# Altium PCB PCB1.PcbDoc
Units mil, origin at the board's own origin, x right, y up, seen from the top; angles counter-clockwise.
Board outline 5700 x 3500 mil, 2 copper layers (Top Layer, Bottom Layer); 35 components, 30 nets, 122 pads, 17 vias.
Unrouted connection lines stored in the file: 59.
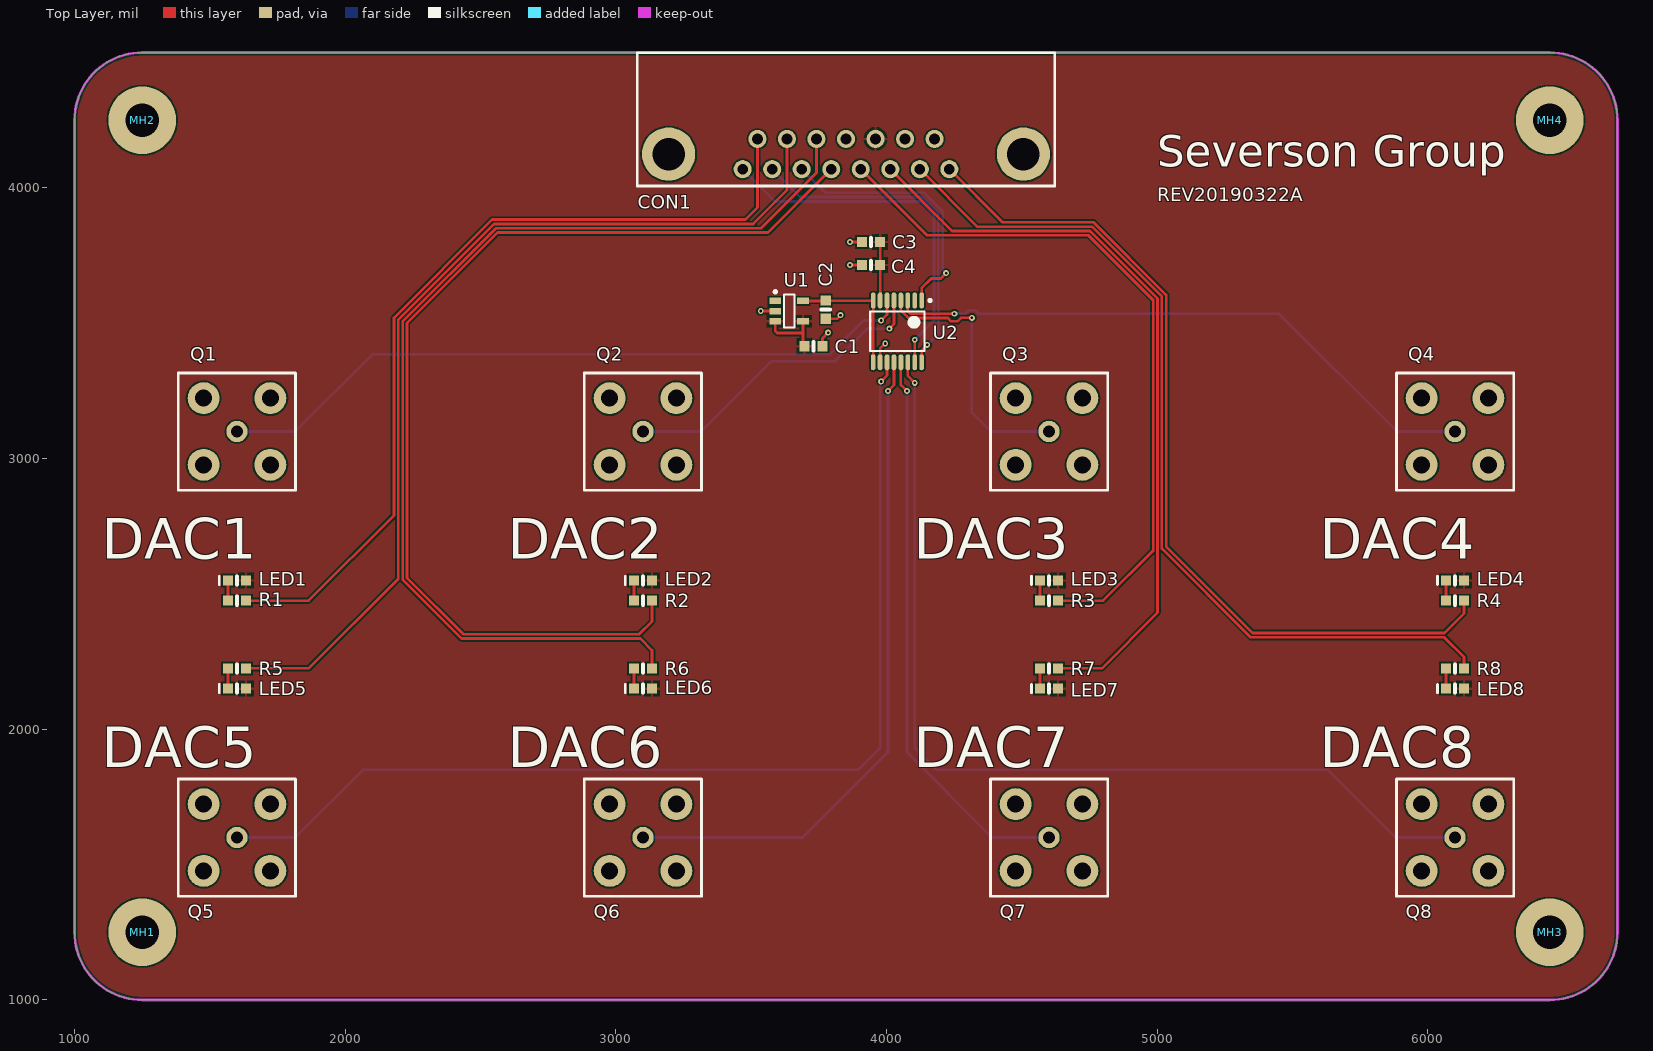
[diagram p0: Top Layer view]
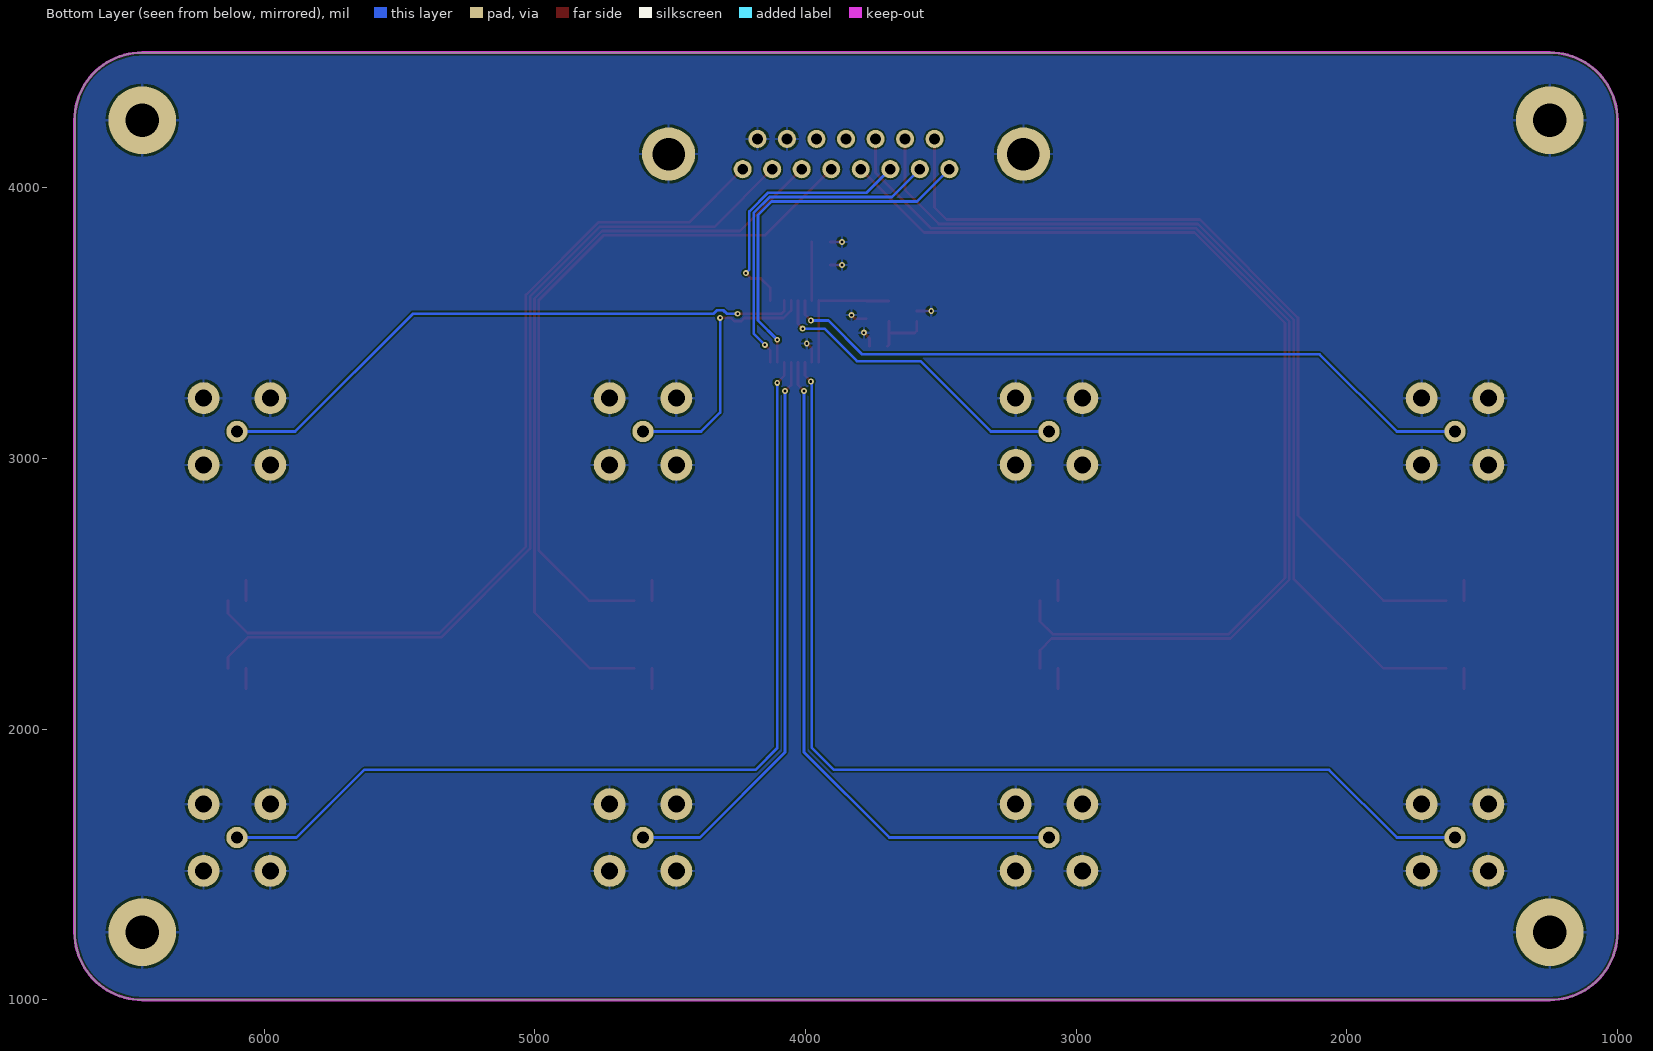
[diagram p1: Bottom Layer view, seen from below]
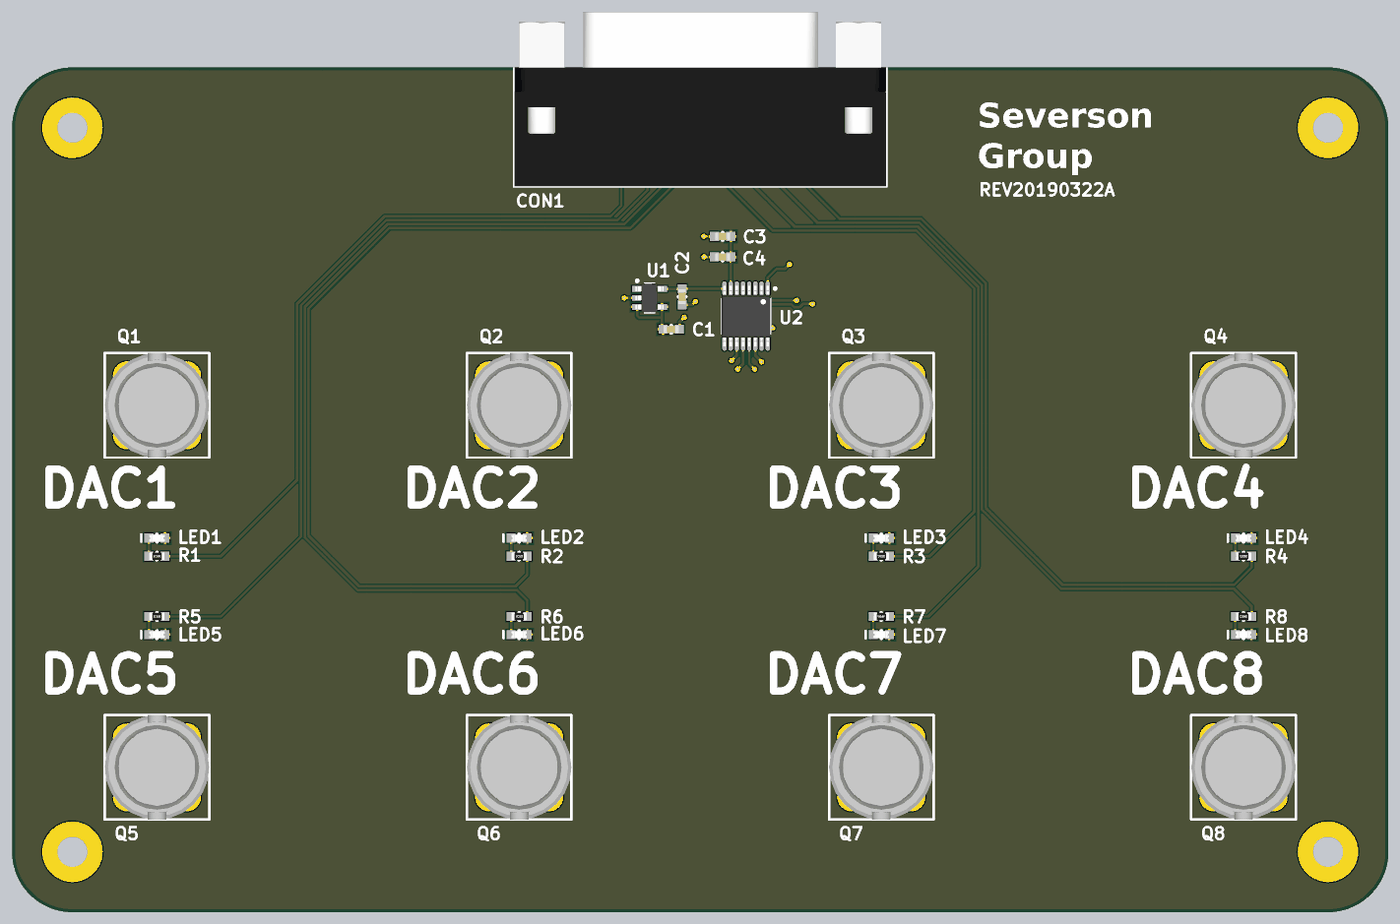
[diagram p2: 3D render of the assembled board from above, using the file's embedded part models]

## Layer stack, top to bottom
Top Solder: solder mask 0.4, Solder Resist, Dk 3.5
Top Layer: signal copper 1.4
Dielectric 1: dielectric 12.6, FR-4, Dk 4.8
Bottom Layer: signal copper 1.4
Bottom Solder: solder mask 0.4, Solder Resist, Dk 3.5

## Board outline
6450,1000 ccw(c6450,1250) 6700,1250 6700,4250 ccw(c6450,4250) 6450,4500 1250,4500 ccw(c1250,4250) 1000,4250 1000,1250 ccw(c1250,1250) 1250,1000

## Design rules (kind name [scope] priority, off if disabled: settings)
BoardOutlineClearance BoardOutlineClearance_tSilk [OnLayer('Top Overlay')] p1: gap=0 ignorepadtopadclearanceinfootprint=FALSE
BoardOutlineClearance BoardOutlineClearance_bSilk [OnLayer('Bottom Overlay')] p2: gap=0 ignorepadtopadclearanceinfootprint=FALSE
BoardOutlineClearance [All] p3: gap=12 ignorepadtopadclearanceinfootprint=FALSE
Clearance [All] p1: gap=6 ignorepadtopadclearanceinfootprint=FALSE except(12: Arc-Via Track-Via)
DiffPairsRouting [All] p1 off: maxlimit=10 minlimit=10 mostfreqgap=10 toplayer_minwidth=10 toplayer_maxwidth=10 toplayer_prefwidth=10 bottomlayer_minwidth=10 bottomlayer_maxwidth=10 bottomlayer_prefwidth=10 maxuncoupledlength=500
Height [All] p1: minheight=0 maxheight=5000 prefheight=500
HoleSize [All] p1: absolutevalues=TRUE maxlimit=248.03 minlimit=7.87 maxpercent=80.000 minpercent=20.000
HoleToHoleClearance [All] p1: gap=12 allowstackedmicrovias=TRUE
MinimumAnnularRing [All] p1: minimumring=6
PolygonConnect [All] p1: connectstyle=Relief reliefconductorwidth=10 reliefentries=4 polygonreliefangle="90 Angle" airgapwidth=10
RoutingVias [All] p1: holewidth=10 width=22 viastyle="Through Hole" minholewidth=10 minwidth=22 maxholewidth=20 maxwidth=50
SolderMaskExpansion [All] p1: expansion=4
Width [All] p1: maxlimit=100 minlimit=6 preferedwidth=10
26 further rules are at their usual default settings.

## Components (designator, comment, footprint, x,y, rotation, side; value= is the part's Value field where it differs from the comment)
C1 "Capacitor" 0603-CAP 3730,3415 r0 top value=4.7uF
C2 "Capacitor" 0603-CAP 3775,3550 r270 top value=4.7uF
C3 "Capacitor" 0603-CAP 3942.83,3800 r0 top value=1uF
C4 "Capacitor" 0603-CAP 3942.83,3715 r0 top value=100nF
CON1 "A-DF 15 A/KG-T2S" "A-DF 15 A/KG-T2S" 3850,4125 r180 top
LED1 "LED" 0603-LED 1600,2550 r0 top
LED2 "LED" 0603-LED 3100,2550 r0 top
LED3 "LED" 0603-LED 4600,2550 r0 top
LED4 "LED" 0603-LED 6100,2550 r0 top
LED5 "LED" 0603-LED 1600,2150 r0 top
LED6 "LED" 0603-LED 3100,2150 r0 top
LED7 "LED" 0603-LED 4600,2150 r0 top
LED8 "LED" 0603-LED 6100,2150 r0 top
MH1 "MOUNT_HOLE" MOUNTING_HOLE 1250,1250 r0 top
MH2 "MOUNT_HOLE" MOUNTING_HOLE 1250,4250 r0 top
MH3 "MOUNT_HOLE" MOUNTING_HOLE 6450,1250 r0 top
MH4 "MOUNT_HOLE" MOUNTING_HOLE 6450,4250 r0 top
Q1 "5-1634503-1" 5-1634503-1 1600,3100 r0 top
Q2 "5-1634503-1" 5-1634503-1 3100,3100 r0 top
Q3 "5-1634503-1" 5-1634503-1 4600,3100 r0 top
Q4 "5-1634503-1" 5-1634503-1 6100,3100 r0 top
Q5 "5-1634503-1" 5-1634503-1 1600,1600 r0 top
Q6 "5-1634503-1" 5-1634503-1 3100,1600 r0 top
Q7 "5-1634503-1" 5-1634503-1 4600,1600 r0 top
Q8 "5-1634503-1" 5-1634503-1 6100,1600 r0 top
R1 "Resistor" 0603-RES 1600,2475 r180 top value=4.7k
R2 "Resistor" 0603-RES 3100,2475 r180 top value=4.7k
R3 "Resistor" 0603-RES 4600,2475 r180 top value=4.7k
R4 "Resistor" 0603-RES 6100,2475 r180 top value=4.7k
R5 "Resistor" 0603-RES 1600,2225 r180 top value=4.7k
R6 "Resistor" 0603-RES 3100,2225 r180 top value=4.7k
R7 "Resistor" 0603-RES 4600,2225 r180 top value=4.7k
R8 "Resistor" 0603-RES 6100,2225 r180 top value=4.7k
U1 "LM4132CMF-4.1/NOPB" SOT95P280X145-5N 3640,3545 r0 top
U2 "DAC128S085" TSOP65P640X120-16N 4040,3470 r270 top

## Footprints (in the part's own frame and the unit in brackets; to place one, negate y for a bottom-side part, rotate by r counter-clockwise, add the part's x,y. Pads: shape width x height; smd on the part's side, far side on the other; paste and mask are expansions set on the pad)
5-1634503-1 [mm] "CONN BNC JACK STR 50 OHM PCB"
  round 2 hole 1.1: 1(0,0)
  round 3 hole 1.6: 2(-3.13,-3.13) 2(-3.13,3.13) 2(3.13,-3.13) 2(3.13,3.13)
  silkscreen extent -5.5,-5.5 5.5,5.5, body extent -5.5,-5.51 5.5,5.51, height 13.7
0603-CAP [mm]
  rect 0.95x0.95 smd: 1(-0.85,0) 2(0.85,0)
  silkscreen extent 0,-0.38 0,0.38, body extent -0.8,-0.4 0.8,0.4, height 0.79
0603-LED [mm]
  rect 0.95x0.95 smd: A(0.85,0) C(-0.85,0)
  silkscreen extent -1.65,-0.38 0,0.38, body extent -0.83,-0.37 0.82,0.81, height 0.8
0603-RES [mm]
  rect 0.95x0.95 smd: 1(-0.85,0) 2(0.85,0)
  silkscreen extent 0,-0.38 0,0.38, body extent -0.8,-0.4 0.8,0.4, height 0.44
"A-DF 15 A/KG-T2S" [mm] "CONN D-SUB RCPT 15POS R/A SOLDER"
  round 1.7 hole 1: 1(9.695,1.42) 2(6.925,1.42) 3(4.155,1.42) 4(1.385,1.42) 5(-1.385,1.42) 6(-4.155,1.42) 7(-6.925,1.42) 8(-9.695,1.42) 9(8.31,-1.42) 10(5.54,-1.42) 11(2.77,-1.42) 12(0,-1.42) 13(-2.77,-1.42) 14(-5.54,-1.42) 15(-8.31,-1.42)
  round 5 hole 3.05: 16(-16.65,0) 17(16.65,0)
  silkscreen extent -19.6,-9.5 19.6,3, body extent -19.57,-15.32 19.57,2.98, height 12.57
MOUNTING_HOLE [mil]
  round 250 hole 125: 1(0,0)
SOT95P280X145-5N [mm] "SOT23, 5-Leads, Body 2.90x2.80mm, Pitch 0.95mm, IPC Medium Density"
  rect 1.1x0.6 smd: 1(-1.3,0.95) 2(-1.3,0) 3(-1.3,-0.95) 4(1.3,-0.95) 5(1.3,0.95)
  silkscreen extent -1.42,-1.55 0.5,1.92, body extent -1.5,-1.53 1.5,1.53, height 1.45
TSOP65P640X120-16N [mm] "TSOP, 16-Leads, Body 5.00x4.40mm, Pitch 0.65mm, IPC Medium Density"
  oval 1.5x0.45 smd: 1(-2.9,2.275) 2(-2.9,1.625) 3(-2.9,0.975) 4(-2.9,0.325) 5(-2.9,-0.325) 6(-2.9,-0.975) 7(-2.9,-1.625) 8(-2.9,-2.275) 9(2.9,-2.275) 10(2.9,-1.625) 11(2.9,-0.975) 12(2.9,-0.325) 13(2.9,0.325) 14(2.9,0.975) 15(2.9,1.625) 16(2.9,2.275)
  silkscreen extent -3.02,-2.55 1.85,3.17, body extent -3.2,-2.55 3.2,2.55, height 1.2

## Part data
C1 C2: Supplier Part Number 1=1276-1044-1-ND, Supplier 1=Digi-Key
C3: Supplier Part Number 1=1276-1182-1-ND, Supplier 1=Digi-Key
C4: Supplier Part Number 1=1276-1012-1-ND, Supplier 1=Digi-Key
CON1: "CONN D-SUB RCPT 15POS R/A SOLDER", Supplier Part Number 1=AE10929-ND, Supplier 1=Digi-Key
LED1 LED2 LED3 LED4 LED5 LED6 LED7 LED8: Color=RED, Supplier Part Number 1=SML-D12U1WT86CT-ND, Supplier 1=Digi-Key
MH1 MH2 MH3 MH4: "MOUNTING HOLE, 4-40"
Q1 Q2 Q3 Q4 Q5 Q6 Q7 Q8: "CONN BNC JACK STR 50 OHM PCB", Supplier Part Number 1=A97581-ND, Supplier 1=Digi-Key
R1 R2 R3 R4 R5 R6 R7 R8: Supplier Part Number 1=311-4.7KGRCT-ND, Supplier 1=Digi-Key
U1: "IC VREF SERIES 4.096V SOT23-5", Supplier Part Number 1=LM4132CMF-4.1/NOPBCT-ND, Supplier 1=Digi-Key
U2: library part DAC128S085CIMT/NOPB, "IC DAC 12BIT 8CH RR OUT 16TSSOP", Supplier Part Number 1=DAC128S085CIMT/NOPB-ND, Supplier 1=Digi-Key

## Via types
v1: diameter 22, hole 10, Top Layer to Bottom Layer, 17 vias

## Nets (pads, with @x,y where several pads share a name; then routed paths per layer and width w, separated by ;. In a path a pad name is that pad's centre, name@x,y a point inside that pad or via, vN(x,y) a via of type N, cw(c..) or ccw(c..) an arc to the next point about the centre after c; other vN are vias at no path point)
5V: C1.1 C3.2 C4.2 CON1.13 LED1.A LED2.A LED3.A LED4.A LED5.A LED6.A LED7.A LED8.A U1.3 U1.4 U2.7 | length 452.5
  Top Layer w10: U1.3 3588.82,3471.18 3596.02,3463.98 3691.18,3463.98 ; U1.4 3691.18,3463.98 ; C1.1 3691.18,3420.35 3691.18,3463.98 ; U2.7 3976.02,3714.72 C4.2 C3.2
GND: C1.2 C2.2 C3.1 C4.1 CON1.14 CON1.15 CON1.16 CON1.17 MH1.1 MH2.1 MH3.1 MH4.1 Q1.2 Q2.2 Q3.2 Q4.2 Q5.2 Q6.2 Q7.2 Q8.2 U1.2 U2.10 | length 338.6
  Top Layer w10: v1(3535,3545) U1.2 ; C1.2 3763.46,3444.53 v1(3783.94,3465) ; C2.2 3816.54,3516.54 v1(3830,3530) ; v1(3865,3715) C4.1 ; v1(3865,3800) C3.1 ; U2.10 3976.02,3406.02 v1(3995,3425)
GPIO1: CON1.1 U2.15 | length 1377.9
  Top Layer w10: U2.15 v1(4103.98,3438.98)
  Bottom Layer w10: CON1.1 3587.4,3950 ; 3615,3950 3587.4,3950 ; v1(4103.98,3438.98) 4175,3510 4175,3900 4125,3950 3587.4,3950
GPIO2: CON1.2 U2.16 | length 1286.7
  Top Layer w10: U2.16 4129.57,3399.92 v1(4150,3420.35)
  Bottom Layer w10: CON1.2 3680.46,3966 ; 3710,3966 3680.46,3966 ; v1(4150,3420.35) 4191,3461.35 4191,3906.63 4131.63,3966 3680.46,3966
GPIO3: CON1.3 U2.1 | length 1014
  Top Layer w10: U2.1 4129.57,3629.57 4165,3665 4200,3665 v1(4220,3685)
  Bottom Layer w10: CON1.3 3773.51,3982 ; 3810,3982 3773.51,3982 ; v1(4220,3685) 4207,3698 4207,3913.25 4138.25,3982 3773.51,3982
GPIO4: CON1.4 R2.1 | length 3831.7
  Top Layer w10: R2.1 3133.46,2398.46 3086,2351 2436.63,2351 2228,2559.63 2228,3500.12 2562.88,3835 3561.38,3835 CON1.4
GPIO5: CON1.5 R3.1 | length 2634.2
  Top Layer w10: CON1.5 4148.62,3825 4745,3825 4985,3585 4985,2660 4800,2475 R3.1
GPIO6: CON1.6 R7.1 | length 2798.7
  Top Layer w10: CON1.6 4241.68,3841 4751.63,3841 5001,3591.63 5001,2431 4795,2225 R7.1
GPIO7: CON1.7 R8.1 | length 3343.9
  Top Layer w10: CON1.7 4334.73,3857 4758.25,3857 5017,3598.25 5017,2668 5345,2340 6060,2340 6133.46,2266.54 R8.1
GPIO8: CON1.8 R4.1 | length 3232.8
  Top Layer w10: CON1.8 4427.79,3873 4764.88,3873 5033,3604.88 5033,2674.63 5351.63,2356 6061,2356 6133.46,2428.46 R4.1
GPIO9: CON1.9 R1.1 | length 3171.8
  Top Layer w10: R1.1 1865,2475 2180,2790 2180,3520 2543,3883 3478,3883 3522.83,3927.83 CON1.9
GPIO10: CON1.10 R5.1 | length 3480.1
  Top Layer w10: R5.1 1865,2225 2196,2556 2196,3513.37 2549.63,3867 3507,3867 3631.89,3991.89 CON1.10
GPIO11: CON1.11 R6.1 | length 3931.4
  Top Layer w10: R6.1 3133.46,2291.54 3090,2335 2430,2335 2212,2553 2212,3506.75 2556.25,3851 3536,3851 3740.94,4055.94 CON1.11
NetLED1_C: LED1.C R1.2 | length 75
  Top Layer w10: R1.2 LED1.C
NetLED2_C: LED2.C R2.2 | length 75
  Top Layer w10: R2.2 LED2.C
NetLED3_C: LED3.C R3.2 | length 75
  Top Layer w10: R3.2 LED3.C
NetLED4_C: LED4.C R4.2 | length 75
  Top Layer w10: R4.2 LED4.C
NetLED5_C: LED5.C R5.2 | length 75
  Top Layer w10: LED5.C R5.2
NetLED6_C: LED6.C R6.2 | length 75
  Top Layer w10: LED6.C R6.2
NetLED7_C: LED7.C R7.2 | length 75
  Top Layer w10: LED7.C R7.2
NetLED8_C: LED8.C R8.2 | length 75
  Top Layer w10: LED8.C R8.2
VOUTA: Q4.1 U2.3 | length 2256.3
  Top Layer w10: U2.3 4078.39,3544.24 4087.63,3535 v1(4250,3535)
  Bottom Layer w10: v1(4250,3535) 4290.4,3535 4303.4,3548 4326.6,3548 4339.6,3535 5450,3535 5885,3100 Q4.1
VOUTB: Q3.1 U2.4 | length 985.2
  Top Layer w10: U2.4 4052.8,3547.2 4081,3519 4226.4,3519 4238.4,3507 4261.6,3507 4274.6,3520 v1(4315,3520)
  Bottom Layer w10: v1(4315,3520) 4315,3170 4385,3100 Q3.1
VOUTC: Q2.1 U2.5 | length 1178.7
  Top Layer w10: v1(4010,3480) 4027.2,3497.2 U2.5
  Bottom Layer w10: Q2.1 3315,3100 3575,3360 3810,3360 3930,3480 v1(4010,3480)
VOUTD: Q1.1 U2.6 | length 2633
  Top Layer w10: v1(3980,3510) 4001.61,3531.61 U2.6
  Bottom Layer w10: Q1.1 1815,3100 2100,3385 3790,3385 3915,3510 v1(3980,3510)
VOUTE: Q8.1 U2.14 | length 3568.5
  Top Layer w10: U2.14 4078.39,3305.59 v1(4103.98,3280)
  Bottom Layer w10: v1(4103.98,3280) 4103.98,1931.02 4185,1850 5630,1850 5880,1600 Q8.1
VOUTF: Q7.1 U2.13 | length 2105.5
  Top Layer w10: U2.13 4052.8,3272.2 v1(4075,3250)
  Bottom Layer w10: v1(4075,3250) 4075,1915 4390,1600 Q7.1
VOUTG: Q6.1 U2.12 | length 2485.5
  Top Layer w10: v1(4005,3250) 4027.2,3272.2 U2.12
  Bottom Layer w10: Q6.1 3690,1600 4005,1915 v1(4005,3250)
VOUTH: Q5.1 U2.11 | length 3948.5
  Top Layer w10: v1(3980,3285) 4001.61,3306.61 U2.11
  Bottom Layer w10: Q5.1 1815,1600 2065,1850 3895,1850 3977,1932 3977,3282 v1(3980,3285)
VREF_4V096: C2.1 U1.5 U2.8 U2.9 | length 488.4
  Top Layer w10: U1.5 3773.94,3582.4 C2.1 3949.72,3583.46 ccw(c3949.72,3584.17) U2.8 U2.9
pads on no net: CON1.12 U1.1 U2.2

## Polygon pours and split planes (outlines as drawn)
5V on Top Layer "5V_L01_P000" (solid, pour order 0): 1000,1250 ccw(c1250,1250) 1250,1000 6450,1000 ccw(c6450,1250) 6700,1250 6700,4250 ccw(c6450,4250) 6450,4500 1250,4500 ccw(c1250,4250) 1000,4250
GND on Bottom Layer "GND_L02_P002" (solid, pour order 2): 1000,1250 ccw(c1250,1250) 1250,1000 6450,1000 ccw(c6450,1250) 6700,1250 6700,4250 ccw(c6450,4250) 6450,4500 1250,4500 ccw(c1250,4250) 1000,4250

## Keep-outs
Keep-Out Layer:
  the board outline again, w10

## Silkscreen, mask and mechanical layers (free items; w line width, h text height)
Top Overlay:
  text "Severson Group" at 5000,4040 h200
  text "REV20190322A" at 5000,3950 h50
  text "DAC1" at 1100,2630 h150
  text "DAC2" at 2600,2630 h150
  text "DAC3" at 4100,2630 h150
  text "DAC4" at 5600,2630 h150
  text "DAC5" at 1100,1860 h150
  text "DAC6" at 2600,1860 h150
  text "DAC7" at 4100,1860 h150
  text "DAC8" at 5600,1860 h150